# Altium PCB PCB1.PcbDoc (part 1 of 4)
Units mm, origin at the board's own origin, x right, y up, seen from the top; angles counter-clockwise.
Board outline 200 x 55 mm, 4 copper layers (Top Layer, Power Layer, GND Layer, Bottom Layer), stack 1.714 mm thick; 403 components, 272 nets, 1346 pads, 787 vias.
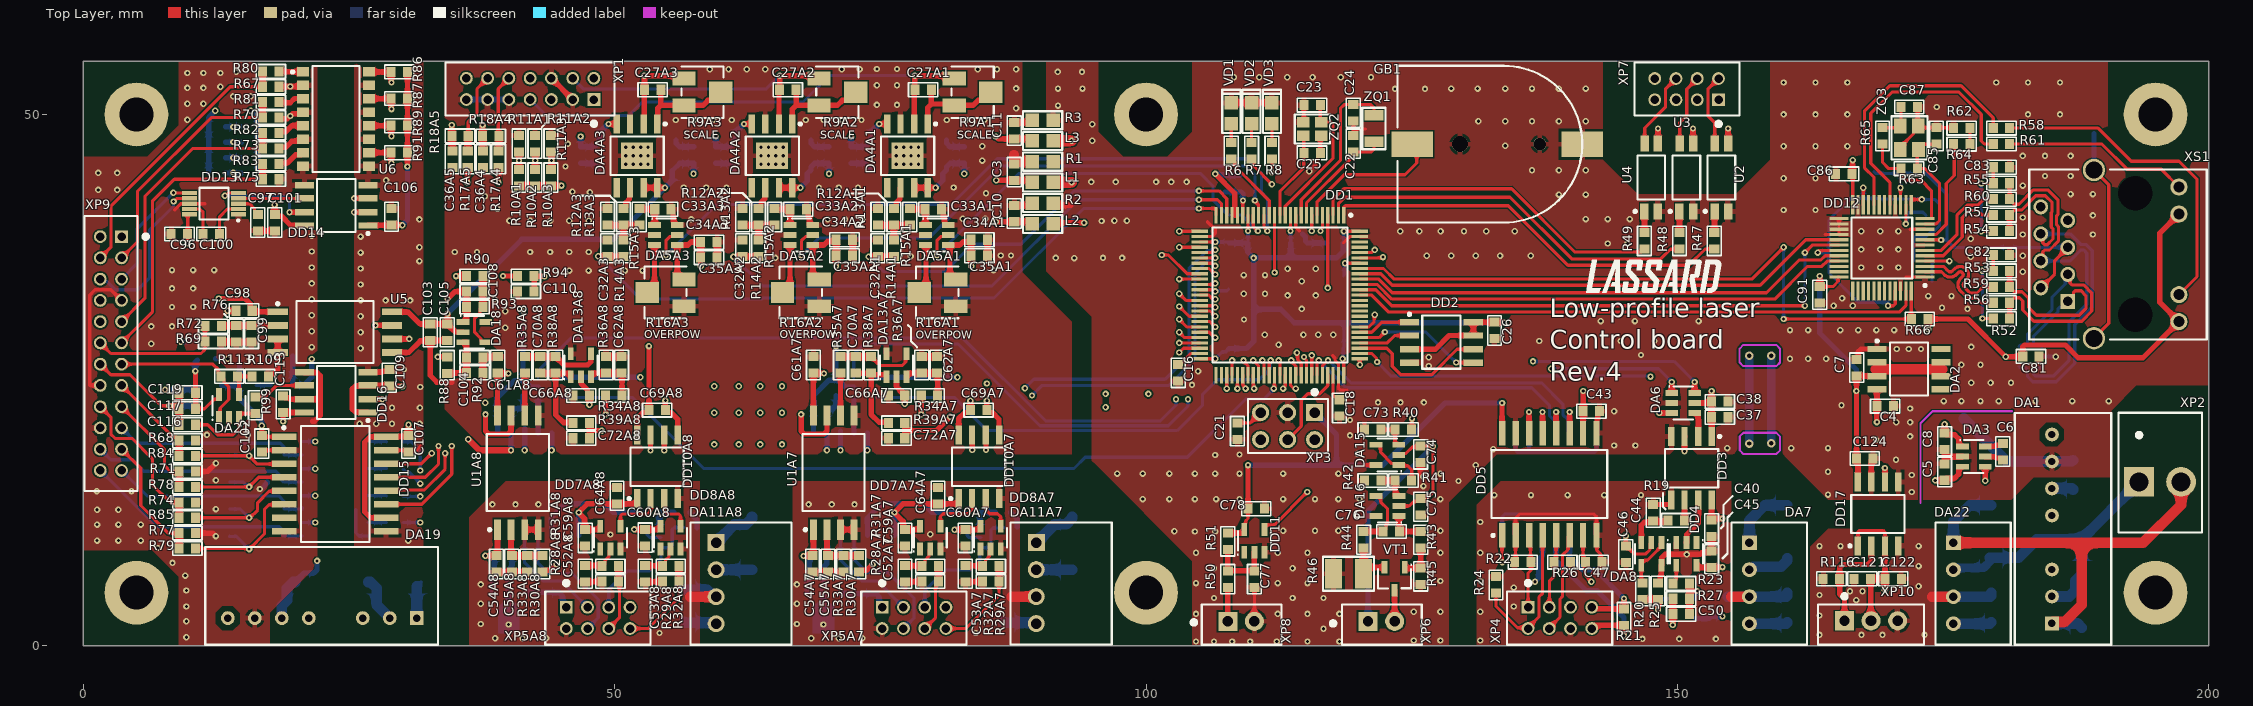
[diagram p0: Top Layer view]
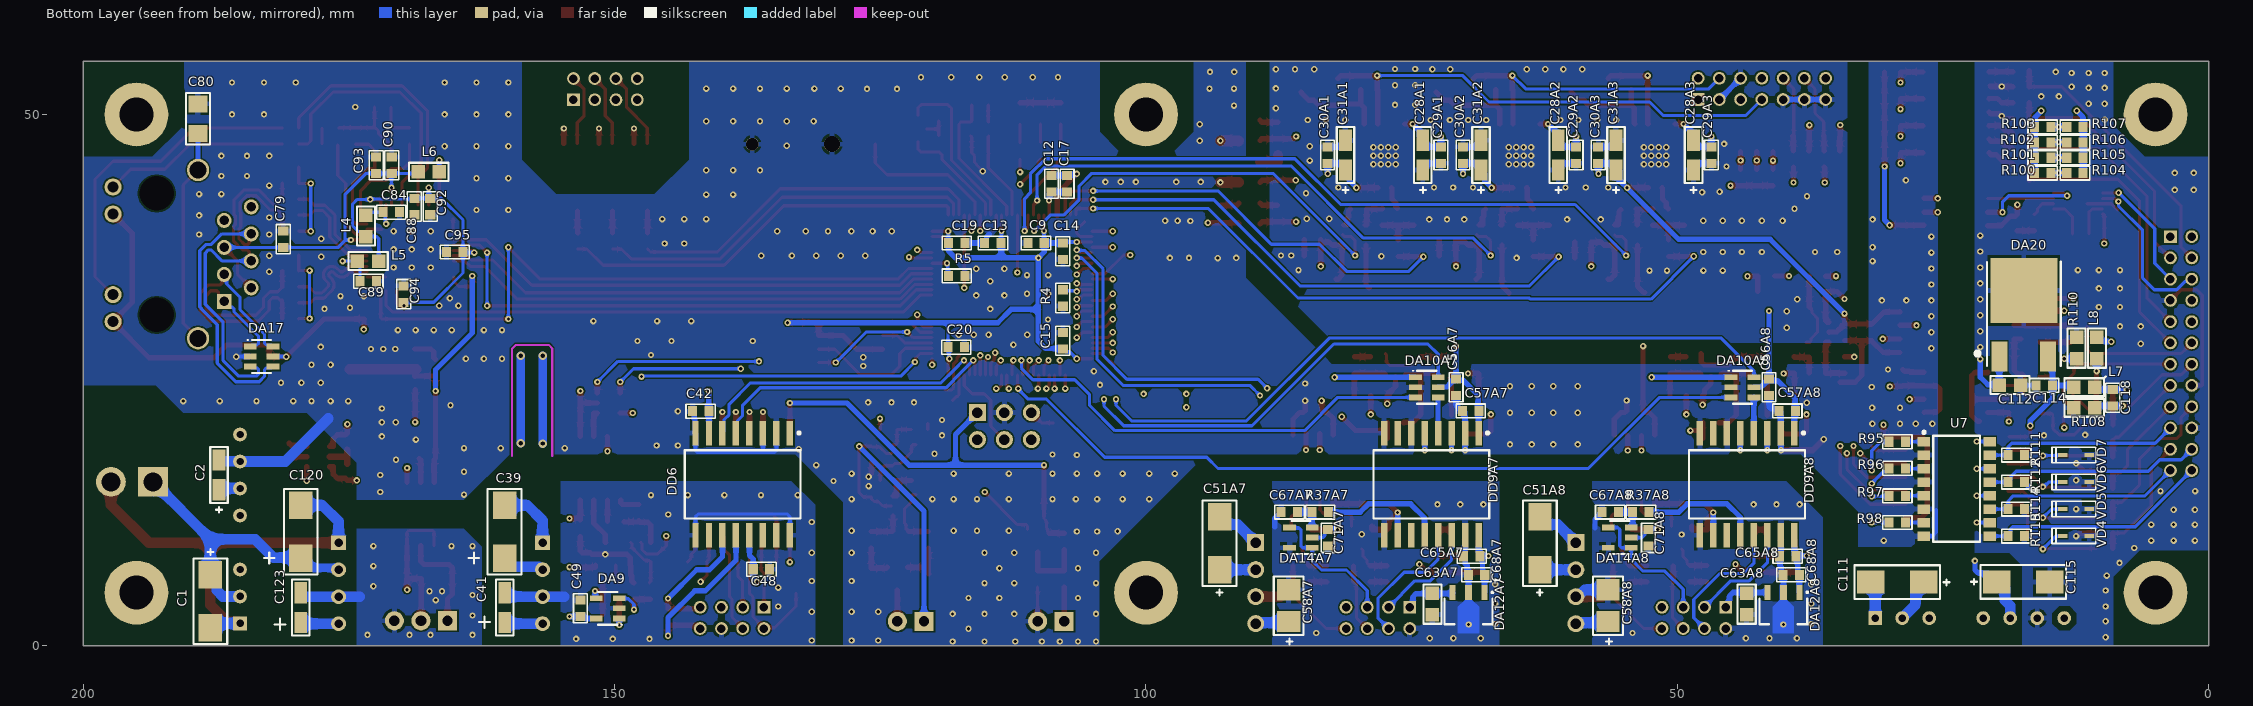
[diagram p1: Bottom Layer view, seen from below]
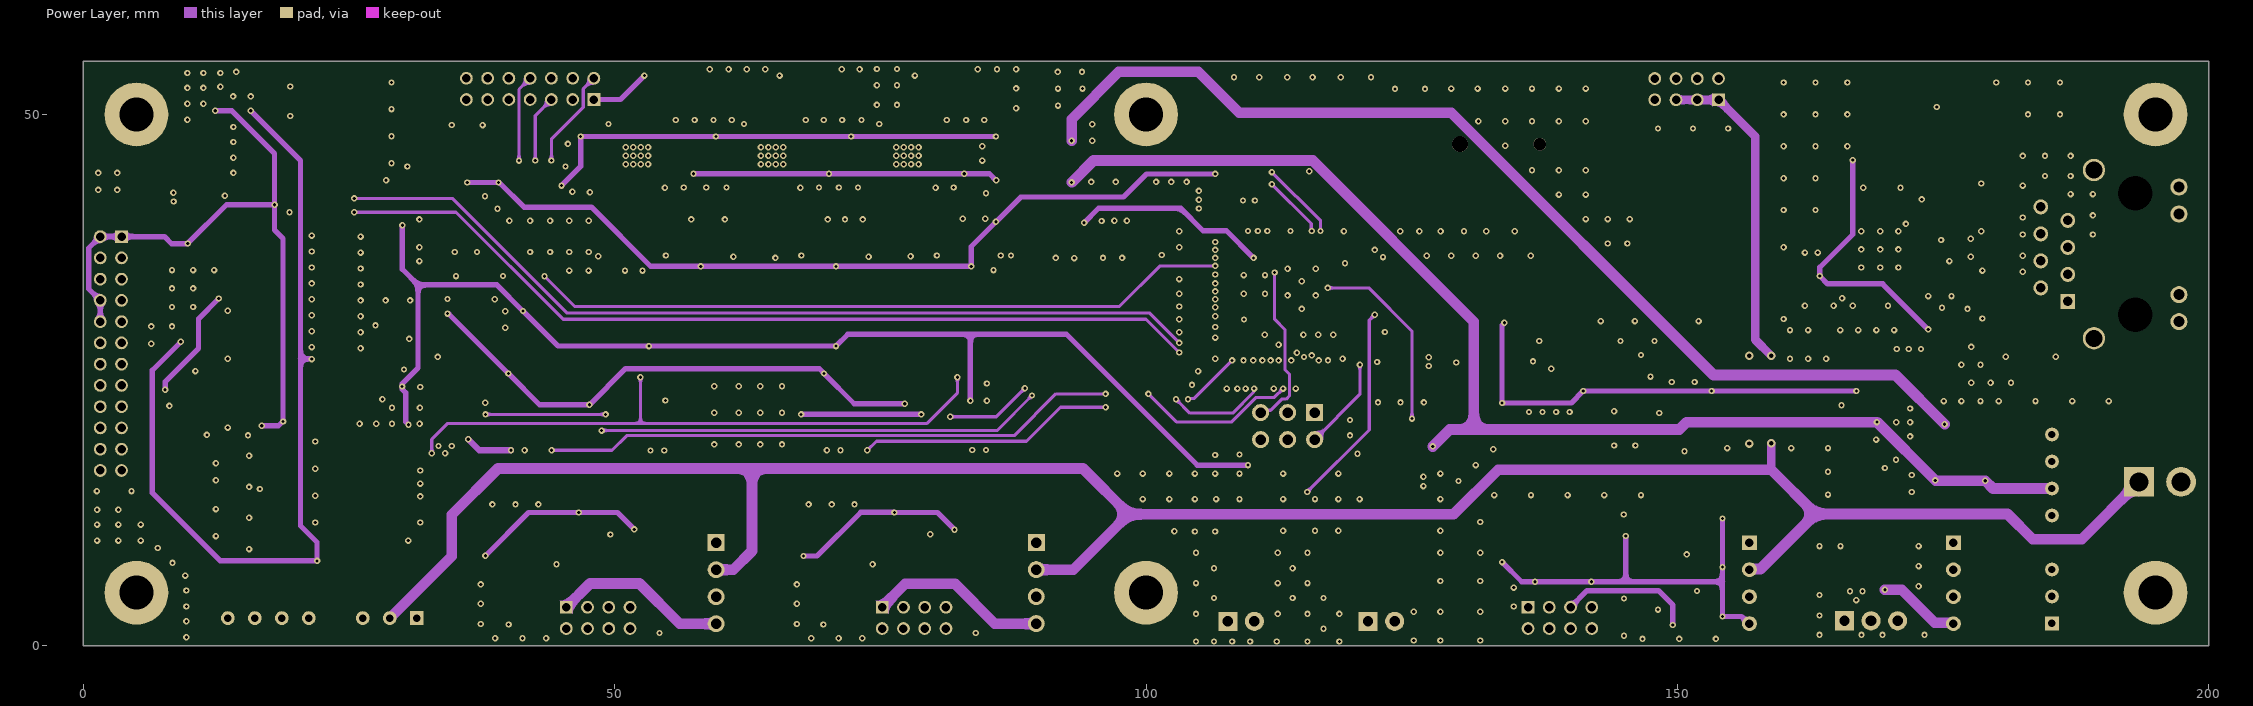
[diagram p2: Power Layer]
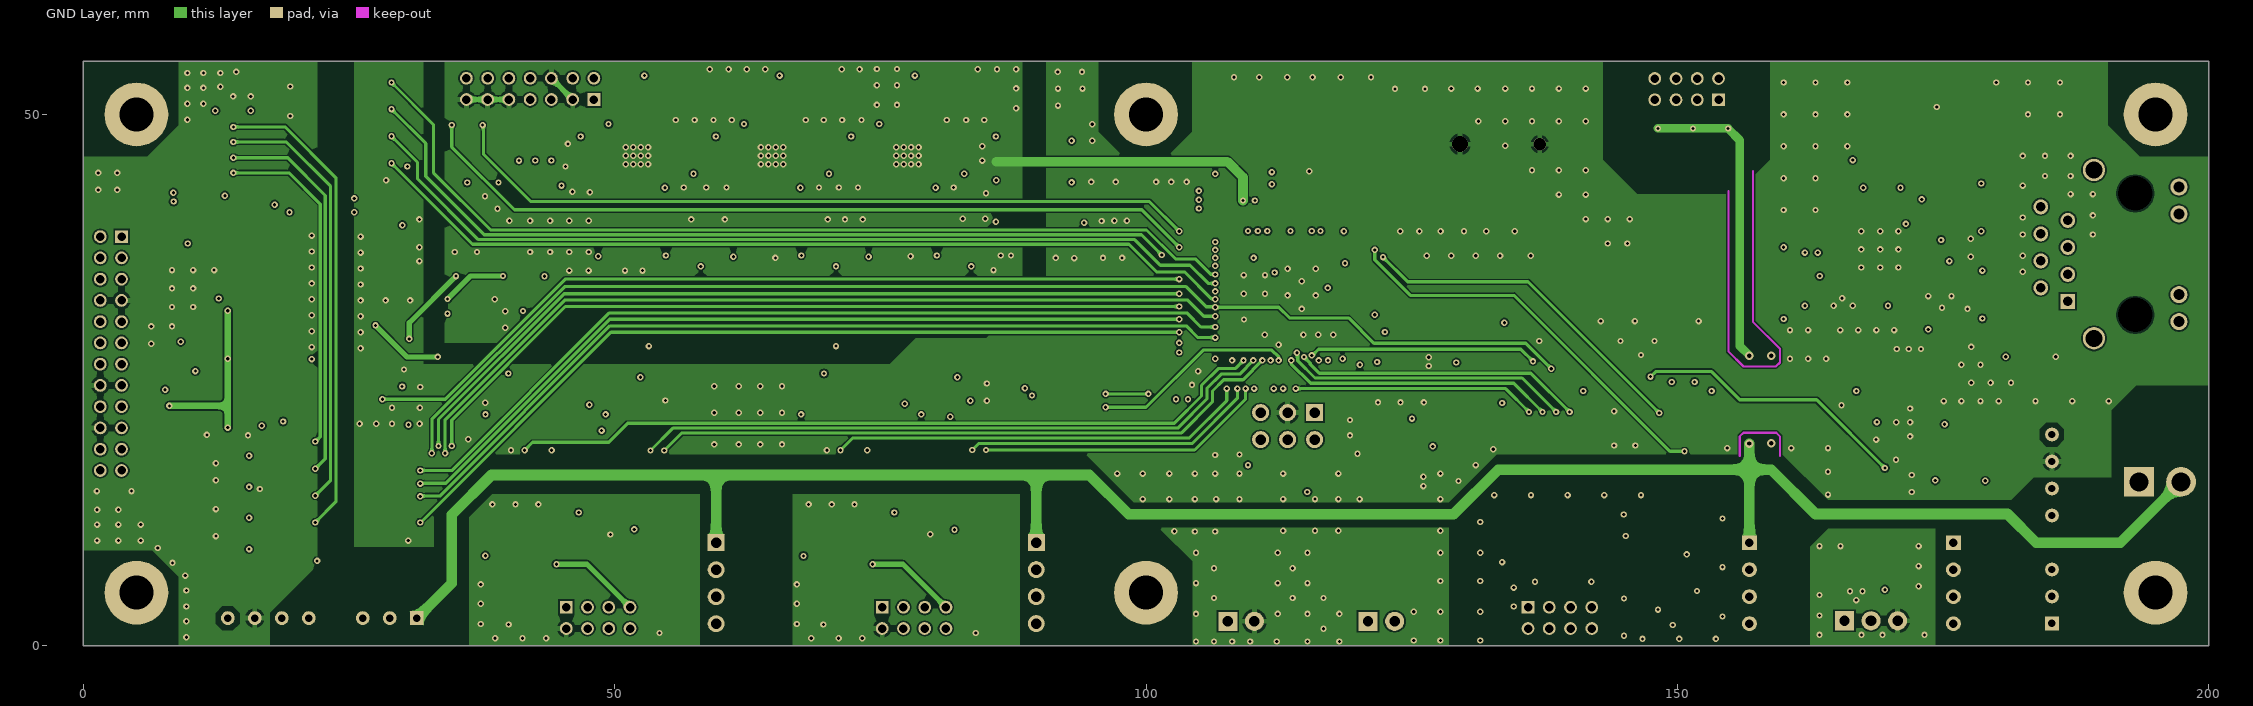
[diagram p3: GND Layer]
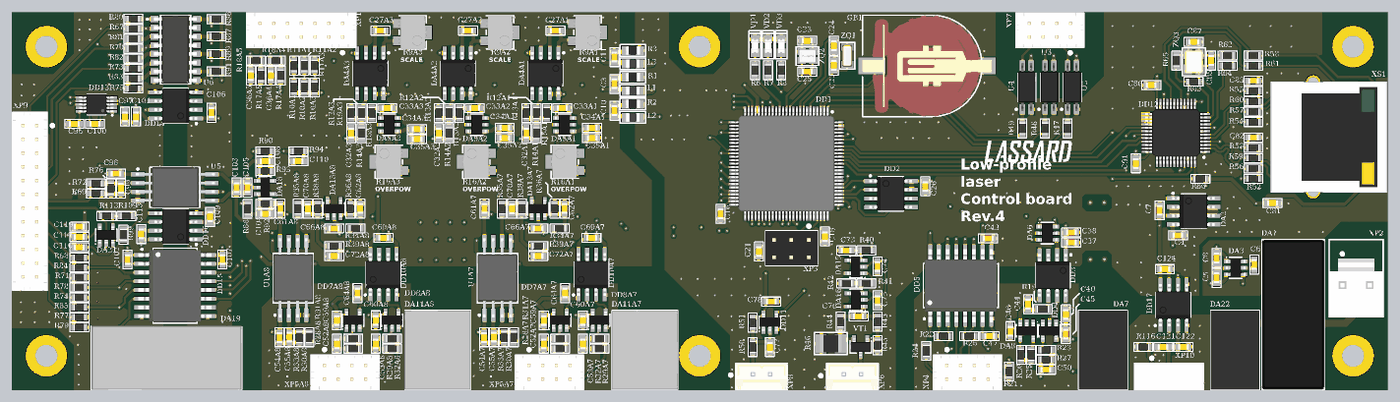
[diagram p7: 3D render of the assembled board from above, using the file's embedded part models]
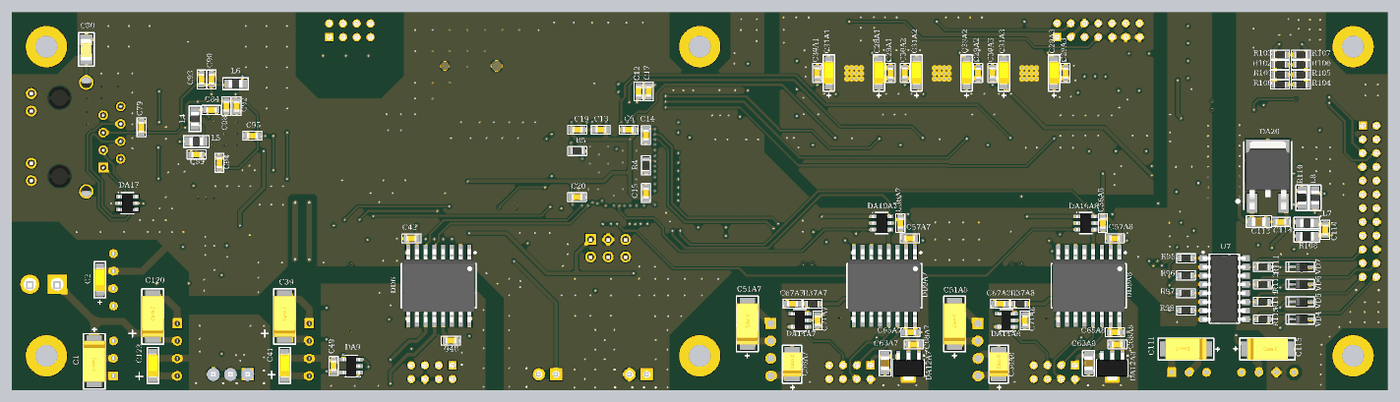
[diagram p8: 3D render of the assembled board from below, using the file's embedded part models]

## Layer stack, top to bottom
Top Solder: solder mask 0.0102, Solder Resist, Dk 3.5
Top Layer: signal copper 0.018
Dielectric 2: prepreg 0.0711, PP-006, Dk 4.1
Power Layer: signal copper 0.018
Dielectric 1: dielectric 1.5, FR-4, Dk 4.8
GND Layer: signal copper 0.018
Dielectric 3: prepreg 0.0711, PP-006, Dk 4.1
Bottom Layer: signal copper 0.018
Bottom Solder: solder mask 0.0102, Solder Resist, Dk 3.5

## Board outline
0,0 0,55 200,55 200,0

## Design rules (kind name [scope] priority, off if disabled: settings)
BoardOutlineClearance [(OnLayer('Bottom Layer') AND OnLayer('Top Layer'))] p1: gap=0.2 ignorepadtopadclearanceinfootprint=FALSE
Clearance [All] p1: gap=0.15 ignorepadtopadclearanceinfootprint=TRUE
DiffPairsRouting [All] p1: maxlimit=0.254 minlimit=0.2 mostfreqgap=0.254 toplayer_minwidth=0.3 toplayer_maxwidth=0.381 toplayer_prefwidth=0.381 midlayer1_minwidth=0.3 midlayer1_maxwidth=0.381 midlayer1_prefwidth=0.381 midlayer2_minwidth=0.3 midlayer2_maxwidth=0.381 midlayer2_prefwidth=0.381 bottomlayer_minwidth=0.3 bottomlayer_maxwidth=0.381 bottomlayer_prefwidth=0.381 maxuncoupledlength=12.7
Height [(OnLayer('Bottom Layer'))] p1: minheight=0 maxheight=3 prefheight=3
HoleSize [All] p1: absolutevalues=TRUE maxlimit=10 minlimit=0.2 maxpercent=80.000 minpercent=20.000
MinimumSolderMaskSliver [All] p1: minsoldermaskwidth=0.04
PlaneClearance [All] p1: clearance=0.5
PlaneConnect [All] p1: planeconnectstyle=Relief reliefexpansion=0.5 reliefentries=4 reliefconductorwidth=0.25 reliefairgap=0.25
PolygonConnect [All] p1: thpad.connectstyle=Relief thpad.reliefconductorwidth=0.5 thpad.reliefentries=4 thpad.polygonreliefangle="90 Angle" thpad.airgapwidth=0.25 smdpad.connectstyle=Relief smdpad.reliefconductorwidth=0.5 smdpad.reliefentries=4 smdpad.polygonreliefangle="90 Angle" smdpad.airgapwidth=0.25 via.connectstyle=Direct via.reliefconductorwidth=0.254 via.reliefentries=4 via.polygonreliefangle="90 Angle" via.airgapwidth=0.152
RoutingCorners [All] p1: cornerstyle=Round minsetback=0.254 maxsetback=2.54
RoutingVias [All] p1: holewidth=0.2 width=0.5 viastyle="Through Hole" minholewidth=0.2 minwidth=0.5 maxholewidth=1 maxwidth=1
SilkToSilkClearance [All] p1: silktosilkclearance=0.1
SilkToSolderMaskClearance [IsPad] p1: minsilkscreentomaskgap=0 clearancetoexposedcopper=TRUE
SolderMaskExpansion [All] p1: expansion=0.102 istentingtop=FALSE
SupplyNets "Schematic Supply Nets_30" [InNet('1V2O')] p1: voltage=0,000
SupplyNets "Schematic Supply Nets_29" [InNet('+12V_DRVA8')] p2: voltage=0,000
SupplyNets "Schematic Supply Nets_28" [InNet('+5V')] p3: voltage=0,000
SupplyNets "Schematic Supply Nets_27" [InNet('+5V_DRVA8')] p4: voltage=0,000
SupplyNets "Schematic Supply Nets_26" [InNet('1V2A')] p5: voltage=0,000
SupplyNets "Schematic Supply Nets_25" [InNet('+3.3VA')] p6: voltage=0,000
SupplyNets "Schematic Supply Nets_24" [InNet('+24V_HW')] p7: voltage=0,000
SupplyNets "Schematic Supply Nets_23" [InNet('+5VA_HW')] p8: voltage=0,000
SupplyNets "Schematic Supply Nets_22" [InNet('GND_24V')] p9: voltage=0,000
SupplyNets "Schematic Supply Nets_21" [InNet('1V2D')] p10: voltage=0,000
SupplyNets "Schematic Supply Nets_20" [InNet('GND_HW')] p11: voltage=0,000
SupplyNets "Schematic Supply Nets_19" [InNet('GND_FS')] p12: voltage=0,000
SupplyNets "Schematic Supply Nets_18" [InNet('GND_DRVA8')] p13: voltage=0,000
SupplyNets "Schematic Supply Nets_17" [InNet('+5V_PS')] p14: voltage=0,000
SupplyNets "Schematic Supply Nets_16" [InNet('+5V_DRVA7')] p15: voltage=0,000
SupplyNets "Schematic Supply Nets_15" [InNet('AGND_HW')] p16: voltage=0,000
SupplyNets "Schematic Supply Nets_14" [InNet('GND')] p17: voltage=0,000
SupplyNets "Schematic Supply Nets_13" [InNet('+5V_HW')] p18: voltage=0,000
SupplyNets "Schematic Supply Nets_12" [InNet('+5V_FS')] p19: voltage=0,000
SupplyNets "Schematic Supply Nets_11" [InNet('+VBAT')] p20: voltage=0,000
SupplyNets "Schematic Supply Nets_10" [InNet('+24VA_HW')] p21: voltage=0,000
SupplyNets "Schematic Supply Nets_9" [InNet('AGND')] p22: voltage=0,000
SupplyNets "Schematic Supply Nets_8" [InNet('+5VA')] p23: voltage=0,000
SupplyNets "Schematic Supply Nets_7" [InNet('+3.3VA_ETH')] p24: voltage=0,000
SupplyNets "Schematic Supply Nets_6" [InNet('-5V')] p25: voltage=0,000
SupplyNets "Schematic Supply Nets_5" [InNet('GND_PS')] p26: voltage=0,000
SupplyNets "Schematic Supply Nets_4" [InNet('-5VA')] p27: voltage=0,000
SupplyNets "Schematic Supply Nets_3" [InNet('+12V_DRVA7')] p28: voltage=0,000
SupplyNets "Schematic Supply Nets_2" [InNet('+24V')] p29: voltage=0,000
SupplyNets "Schematic Supply Nets_1" [InNet('+3.3V')] p30: voltage=0,000
SupplyNets "Schematic Supply Nets" [InNet('GND_DRVA7')] p31: voltage=0,000
Width [All] p1: maxlimit=1 minlimit=0.2 preferedwidth=0.3 minimp=50.000000 maximp=50.000000 favimp=50.000000
21 further rules are at their usual default settings.

## Classes and differential pairs
component class A8: C51A8 C52A8 C53A8 C54A8 C55A8 C56A8 C57A8 C58A8 C59A8 C60A8 C61A8 C62A8 C63A8 C64A8 C65A8 C66A8 C67A8 C68A8 C69A8 C70A8 C71A8 C72A8 DA10A8 DA11A8 DA12A8 DA13A8 DA14A8 DD7A8 DD8A8 DD9A8 DD10A8 R28A8 R29A8 R30A8 R31A8 R32A8 R33A8 R34A8 R35A8 R36A8 R37A8 R38A8 R39A8 U1A8 XP5A8
component class A5: C36A5 R17A5 R18A5
component class A14: C120 C121 C122 C123 C124 DA22 DD17 R116 XP10
component class A9: C73 C74 C75 C76 DA15 DA16 R40 R41 R42 R43 R44 R45 R46 VT1 XP6
component class A3: C27A3 C28A3 C29A3 C30A3 C31A3 C32A3 C33A3 C34A3 C35A3 DA4A3 DA5A3 DA5A11 R9A3 R10A3 R11A3 R12A3 R13A3 R14A3 R15A3 R16A3
component class A11: C77 C78 DD11 R50 R51 XP8
component class Main: C1 C2 C3 C4 C5 C6 C7 C8 C9 C10 C11 C12 C13 C14 C15 C16 C17 C18 C19 C20 C21 C22 C23 C24 C25 C26 DA1 DA2 DA3 DD1 DD2 GB1 L1 L2 L3 R1 R2 R3 R4 R5 R6 R7 R8 VD1 VD2 VD3 XP1 XP2 XP3 ZQ1 ZQ2
component class A13: C96 C97 C98 C99 C100 C101 C102 C103 C104 C105 C106 C107 C108 C109 C110 C111 C112 C113 C114 C115 C116 C117 C118 C119 DA18 DA19 DA20 DA21 DD13 DD14 DD15 DD16 L7 L8 R67 R68 R69 R70 R71 R72 R73 R74 R75 R76 R77 R78 R79 R80 R81 R82 R83 R84 R85 R86 R87 R88 R89 R90 R91 R92 R93 R94 R95 R96 R97 R98 R99 R100 R101 R102 R103 R104 R105 R106 R107 R108 R109 R110 R111 R112 R113 R114 R115 U5 U6 U7 VD4 VD5 VD6 VD7 XP9
component class A6: C37 C38 C39 C40 C41 C42 C43 C44 C45 C46 C47 C48 C49 C50 DA6 DA7 DA8 DA9 DD3 DD4 DD5 DD6 R19 R20 R21 R22 R23 R24 R25 R26 R27 XP4
component class A12: C79 C80 C81 C82 C83 C84 C85 C86 C87 C88 C89 C90 C91 C92 C93 C94 C95 DA17 DD12 L4 L5 L6 R52 R53 R54 R55 R56 R57 R58 R59 R60 R61 R62 R63 R64 R65 R66 XS1 ZQ3
differential pair class TD: TXO
differential pair class RD: RXI
channel class Thermistor: A4 A5
channel class Photodiode: A1 A2 A3
channel class LD_driver: A7 A8
component class A10: R47 R48 R49 U2 U3 U4 XP7
component class A7: C51A7 C52A7 C53A7 C54A7 C55A7 C56A7 C57A7 C58A7 C59A7 C60A7 C61A7 C62A7 C63A7 C64A7 C65A7 C66A7 C67A7 C68A7 C69A7 C70A7 C71A7 C72A7 DA10A7 DA11A7 DA12A7 DA13A7 DA14A7 DD7A7 DD8A7 DD9A7 DD10A7 R28A7 R29A7 R30A7 R31A7 R32A7 R33A7 R34A7 R35A7 R36A7 R37A7 R38A7 R39A7 U1A7 XP5A7
component class A4: C36A4 R17A4 R18A4
component class A2: C27A2 C28A2 C29A2 C30A2 C31A2 C32A2 C33A2 C34A2 C35A2 DA4A2 DA5A2 R9A2 R10A2 R11A2 R12A2 R13A2 R14A2 R15A2 R16A2
component class A1: C27A1 C28A1 C29A1 C30A1 C31A1 C32A1 C33A1 C34A1 C35A1 DA4A1 DA5A1 R9A1 R10A1 R11A1 R12A1 R13A1 R14A1 R15A1 R16A1
differential pair TXO: +TXO_P -TXO_N
differential pair TD: +TD_P -TD_N
differential pair RXI: +RXI_P -RXI_N
differential pair RD: +RD_P -RD_N

## Components (designator, comment, footprint, x,y, rotation, side; value= is the part's Value field where it differs from the comment)
C1 "10мкФх35B" CAP_C 188.05,6.7 r270 bottom
C2 "10мкФх10B" CAP_A 187.225,14.675 r90 bottom
C3 "0,1мкФ" CAP_0603 87.6,43.775 r90 top
C4 "0,1мкФ" CAP_0603 170.35,22.55 r180 top
C5 "10мкФ" CAP_0603 175.15,15.55 r90 top
C6 "1мкФ" CAP_0603 180.625,17.475 r90 top
C7 "10мкФ" CAP_0603 166.875,25.375 r90 top
C8 "10мкФ" CAP_0603 175.15,20.05 r270 top
C9 "0,1мкФ" CAP_0603 109.55,37.9 r0 bottom
C10 "0,1мкФ" CAP_0603 87.6,39.875 r90 top
C11 "0,1мкФ" CAP_0603 87.6,47.675 r90 top
C12 "0,1мкФ" CAP_0603 108.891,42.683 r90 bottom
C13 "0,1мкФ" CAP_0603 115.2,37.9 r180 bottom
C14 "0,1мкФ" CAP_0603 107.825,36.325 r90 bottom
C15 "0,1мкФ" CAP_0603 107.825,29.5 r270 bottom
C16 "2,2мкФ" CAP_0603 103.025,26.475 r270 top
C17 "0,1мкФ" CAP_0603 107.425,42.675 r90 bottom
C18 "2,2мкФ" CAP_0603 118.2,23.175 r270 top
C19 "0,1мкФ" CAP_0603 118.6,37.9 r180 bottom
C20 "0,1мкФ" CAP_0603 118.65,28.1 r180 bottom
C21 "0,1мкФ" CAP_0603 108.6,21 r270 top
C22 "18пФ" CAP_0603 119.5,46.45 r90 top
C23 "8пФ" CAP_0603 116.425,50.875 r180 top
C24 "18пФ" CAP_0603 119.5,50.95 r270 top
C25 "8пФ" CAP_0603 114.825,46.375 r0 top
C26 "0,1мкФ" CAP_0603 132.796,30.471 r270 top
C27A1 "22пФ" CAP_0603 79.825,52.325 r180 top (schematic designator C27)
C27A2 "22пФ" CAP_0603 67.1,52.325 r180 top (schematic designator C27)
C27A3 "22пФ" CAP_0603 54.375,52.325 r180 top (schematic designator C27)
C28A1 "10мкФх10B" CAP_A 73.95,44.775 r90 bottom (schematic designator C28)
C28A2 "10мкФх10B" CAP_A 61.2,44.775 r90 bottom (schematic designator C28)
C28A3 "10мкФх10B" CAP_A 48.475,44.775 r90 bottom (schematic designator C28)
C29A1 "0,1мкФ" CAP_0603 72.25,46.975 r270 bottom (schematic designator C29)
C29A2 "0,1мкФ" CAP_0603 59.525,46.975 r270 bottom (schematic designator C29)
C29A3 "0,1мкФ" CAP_0603 46.8,46.975 r270 bottom (schematic designator C29)
C30A1 "0,1мкФ" CAP_0603 82.925,45.375 r90 bottom (schematic designator C30)
C30A2 "0,1мкФ" CAP_0603 70.175,45.375 r90 bottom (schematic designator C30)
C30A3 "0,1мкФ" CAP_0603 57.45,45.375 r90 bottom (schematic designator C30)
C31A1 "10мкФх10B" CAP_A 81.225,44.775 r90 bottom (schematic designator C31)
C31A2 "10мкФх10B" CAP_A 68.475,44.775 r90 bottom (schematic designator C31)
C31A3 "10мкФх10B" CAP_A 55.775,44.775 r90 bottom (schematic designator C31)
C32A1 "0,1мкФ" CAP_0603 74.775,36.6 r90 top (schematic designator C32)
C32A2 "0,1мкФ" CAP_0603 62.05,36.6 r90 top (schematic designator C32)
C32A3 "0,1мкФ" CAP_0603 49.325,36.6 r90 top (schematic designator C32)
C33A1 "22пФ" CAP_0603 79.2,41.075 r0 top (schematic designator C33)
C33A2 "22пФ" CAP_0603 66.475,41.075 r0 top (schematic designator C33)
C33A3 "22пФ" CAP_0603 53.75,41.075 r0 top (schematic designator C33)
C34A1 "0,1мкФ" CAP_0603 83.525,38.205 r0 top (schematic designator C34)
C34A2 "0,1мкФ" CAP_0603 70.825,38.205 r0 top (schematic designator C34)
C34A3 "0,1мкФ" CAP_0603 58.075,37.98 r0 top (schematic designator C34)
C35A1 "2,2мкФ" CAP_0603 83.525,36.705 r0 top (schematic designator C35)
C35A2 "2,2мкФ" CAP_0603 70.825,36.705 r0 top (schematic designator C35)
C35A3 "2,2мкФ" CAP_0603 58.075,36.525 r0 top (schematic designator C35)
C36A4 "0,1мкФ" CAP_0603 37.628,46.597 r270 top (schematic designator C36)
C36A5 "0,1мкФ" CAP_0603 34.725,46.6 r270 top (schematic designator C36)
C37 "0,1мкФ" CAP_0603 153.2,21.5 r0 top
C38 "0,1мкФ" CAP_0603 153.2,22.975 r0 top
C39 "10мкФх35B" CAP_C 160.35,8.225 r90 bottom
C40 "0,1мкФ" CAP_0603 153.225,11.85 r270 top
C41 "10мкФх10B" CAP_A 160.35,2.2 r90 bottom
C42 "0,1мкФ" CAP_0603 141.106,22.075 r0 bottom
C43 "0,1мкФ" CAP_0603 141.106,22.075 r0 top
C44 "10нФ" CAP_0603 147.725,11.725 r90 top
C45 "0,1мкФ" CAP_0603 153.225,7.35 r90 top
C46 "0,1мкФ" CAP_0603 145.15,9.4 r270 top
C47 "0,1мкФ" CAP_0603 141.331,7.875 r0 top
C48 "0,1мкФ" CAP_0603 136.981,7.2 r180 bottom
C49 "0,1мкФ" CAP_0603 153.225,2.725 r90 bottom
C50 "1500пФ" CAP_0603 151.15,2.975 r180 top
C51A7 "10мкФх35B" CAP_C 93.075,7.15 r90 bottom (schematic designator C51)
C51A8 "10мкФх35B" CAP_C 62.925,7.15 r90 bottom (schematic designator C51)
C52A7 "0,1мкФ" CAP_0603 77.325,7.575 r270 top (schematic designator C52)
C52A8 "0,1мкФ" CAP_0603 47.225,7.575 r270 top (schematic designator C52)
C53A7 "0,1мкФ" CAP_0603 83,7.575 r270 top (schematic designator C53)
C53A8 "0,1мкФ" CAP_0603 52.875,7.575 r270 top (schematic designator C53)
C54A7 "0,1мкФ" CAP_0603 68.625,8.5 r270 top (schematic designator C54)
C54A8 "0,1мкФ" CAP_0603 38.875,8.5 r270 top (schematic designator C54)
C55A7 "100пФ" CAP_0603 70.075,6.9 r90 top (schematic designator C55)
C55A8 "100пФ" CAP_0603 40.325,6.9 r90 top (schematic designator C55)
C56A7 "0,1мкФ" CAP_0603 70.825,25.125 r270 bottom (schematic designator C56)
C56A8 "0,1мкФ" CAP_0603 41.375,25.125 r270 bottom (schematic designator C56)
C57A7 "0,1мкФ" CAP_0603 68.65,22.1 r0 bottom (schematic designator C57)
C57A8 "0,1мкФ" CAP_0603 38.85,22.1 r0 bottom (schematic designator C57)
C58A7 "10мкФх25B" CAP_B 86.575,2.275 r90 bottom (schematic designator C58)
C58A8 "10мкФх25B" CAP_B 56.525,2.275 r90 bottom (schematic designator C58)
C59A7 "0,1мкФ" CAP_0603 77.325,10.95 r270 top (schematic designator C59)
C59A8 "0,1мкФ" CAP_0603 47.225,10.95 r270 top (schematic designator C59)
C60A7 "0,1мкФ" CAP_0603 83,10.95 r270 top (schematic designator C60)
C60A8 "0,1мкФ" CAP_0603 52.875,10.975 r270 top (schematic designator C60)
C61A7 "0,1мкФ" CAP_0603 68.7,25.625 r90 top (schematic designator C61)
C61A8 "0,1мкФ" CAP_0603 39,25.625 r90 top (schematic designator C61)
C62A7 "100пФ" CAP_0603 80.35,25.625 r90 top (schematic designator C62)
C62A8 "100пФ" CAP_0603 50.65,25.625 r90 top (schematic designator C62)
C63A7 "0,33мкФ" CAP_0805 73.05,2.925 r90 bottom (schematic designator C63)
C63A8 "0,33мкФ" CAP_0805 43.475,2.925 r90 bottom (schematic designator C63)
C64A7 "0,1мкФ" CAP_0603 80.425,13.325 r90 top (schematic designator C64)
C64A8 "0,1мкФ" CAP_0603 50.225,13.325 r90 top (schematic designator C64)
C65A7 "0,1мкФ" CAP_0603 68.55,8.425 r0 bottom (schematic designator C65)
C65A8 "0,1мкФ" CAP_0603 38.825,8.425 r0 bottom (schematic designator C65)
C66A7 "0,1мкФ" CAP_0603 77.325,23.55 r180 top (schematic designator C66)
C66A8 "0,1мкФ" CAP_0603 47.65,23.55 r180 top (schematic designator C66)
C67A7 "10нФ" CAP_0603 85.7,12.575 r0 bottom (schematic designator C67)
C67A8 "10нФ" CAP_0603 55.525,12.575 r0 bottom (schematic designator C67)
C68A7 "0,1мкФ" CAP_0603 68.1,6.675 r0 bottom (schematic designator C68)
C68A8 "0,1мкФ" CAP_0603 38.475,6.675 r0 bottom (schematic designator C68)
C69A7 "0,1мкФ" CAP_0603 83.45,22.175 r0 top (schematic designator C69)
C69A8 "0,1мкФ" CAP_0603 53.2,22.175 r0 top (schematic designator C69)
C70A7 "100пФ" CAP_0603 72.691,27.225 r270 top (schematic designator C70)
C70A8 "100пФ" CAP_0603 43,27.225 r270 top (schematic designator C70)
C71A7 "0,1мкФ" CAP_0603 82.875,10.95 r270 bottom (schematic designator C71)
C71A8 "0,1мкФ" CAP_0603 52.725,10.95 r270 bottom (schematic designator C71)
C72A7 "0,1мкФ" CAP_0603 77.325,19.525 r180 top (schematic designator C72)
C72A8 "0,1мкФ" CAP_0603 47.65,19.525 r180 top (schematic designator C72)
C73 "1мкФ" CAP_0603 122.125,20.35 r180 top
C74 "0,1мкФ" CAP_0603 125.837,18.813 r270 top
C75 "0,1мкФ" CAP_0603 125.85,13.875 r270 top
C76 "100пФ" CAP_0603 123.896,10.757 r180 top
C77 "1мкФ" CAP_0603 110.2,7.075 r270 top
C78 "0,1мкФ" CAP_0603 109.575,12.9 r0 top
C79 "0,1мкФ" CAP_0603 181.179,37.462 r90 bottom
C80 "1нФх2кВ" CAP_1206 189.2,48.2 r90 bottom
C81 "0,1мкФ" CAP_0603 182.475,27.225 r0 top
C82 "0,1мкФ" CAP_0603 179.7,36.778 r0 top
C83 "0,1мкФ" CAP_0603 179.7,45.025 r0 top
C84 "0,1мкФ" CAP_0603 171.825,40.8 r180 bottom
C85 "8пФ" CAP_0603 174.375,47.175 r90 top
C86 "0,1мкФ" CAP_0603 166.475,44.4 r180 top
C87 "8пФ" CAP_0603 171.025,50.7 r0 top
C88 "0,1мкФ" CAP_0603 168.85,42.135 r270 bottom
C89 "0,1мкФ" CAP_0603 173.975,34.3 r180 bottom
C90 "0,1мкФ" CAP_0603 170.975,44.425 r90 bottom
C91 "0,1мкФ" CAP_0603 163.4,33.825 r270 top
C92 "0,1мкФ" CAP_0603 167.35,42.135 r270 bottom
C93 "0,1мкФ" CAP_0603 172.442,44.425 r90 bottom
C94 "0,1мкФ" CAP_0603 169.85,32.295 r90 bottom
C95 "0,1мкФ" CAP_0603 164.245,37.05 r0 bottom
C96 "0,1мкФ" CAP_0603 9.85,38.75 r180 top
C97 "0,1мкФ" CAP_0603 16.425,40.625 r270 top
C98 "0,1мкФ" CAP_0603 15.925,31.525 r180 top
C99 "100пФ" CAP_0603 15.841,28.55 r90 top
C100 "0,1мкФ" CAP_0603 11.25,38.75 r0 top
C101 "0,1мкФ" CAP_0603 18.025,40.625 r270 top
C102 "0,1мкФ" CAP_0603 16.8,19.825 r270 top
C103 "0,1мкФ" CAP_0603 32.65,30.3 r270 top
C104 "100пФ" CAP_0603 36.025,25.682 r0 top
C105 "0,1мкФ" CAP_0603 34.25,30.307 r270 top
C106 "0,1мкФ" CAP_0603 29,39.575 r90 top
C107 "0,1мкФ" CAP_0603 30.6,19.825 r270 top
C108 "100пФ" CAP_0603 37.625,33.332 r180 top
C109 "0,1мкФ" CAP_0603 28.8,24.425 r90 top
C110 "0,1мкФ" CAP_0603 42.45,33.332 r180 top
C111 "10мкФх35B" CAP_C 26.8,6 r0 bottom
C112 "0,33мкФ" CAP_0805 17.7,24.535 r0 bottom
C113 "0,1мкФ" CAP_0603 18.8,21.925 r90 top
C114 "0,1мкФ" CAP_0603 14.675,24.5 r0 bottom
C115 "10мкФх35B" CAP_C 19.959,6 r180 bottom
C116 "1мкФ" CAP_0603 10.6,20.8 r180 top
C117 "0,1мкФ" CAP_0603 10.6,22.3 r180 top
C118 "0,1мкФ" CAP_0603 9.032,24.145 r270 bottom
C119 "0,1мкФ" CAP_0603 10.599,23.807 r180 top
C120 "10мкФх35B" CAP_C 179.525,8.225 r90 bottom
C121 "0,1мкФ" CAP_0603 168.2,6.3 r180 top
C122 "0,1мкФ" CAP_0603 169.5,6.3 r0 top
C123 "10мкФх10B" CAP_A 179.525,2.2 r90 bottom
C124 "0,1мкФ" CAP_0603 166.825,17.625 r0 top
DA1 "TMR 6-2411" "TMR3 (SIP-8)" 185.25,2.1 r90 top
DA2 "LD1117D33CTR" SOIC-8 168.8,27.925 r0 top
DA3 "LM2776DBVR" SOT-23-6 176.825,18.75 r0 top
DA4A1 "ADA4817-1ARDZ" "SOIC-8 EPAD" 79.45,49.105 r270 top (schematic designator DA4)
DA4A2 "ADA4817-1ARDZ" "SOIC-8 EPAD" 66.716,49.105 r270 top (schematic designator DA4)
DA4A3 "ADA4817-1ARDZ" "SOIC-8 EPAD" 54,49.105 r270 top (schematic designator DA4)
DA5A1 "TLV3501AIDBVR" SOT-23-6 79.25,39.6 r0 top (schematic designator DA5)
DA5A2 "TLV3501AIDBVR" SOT-23-6 66.5,39.6 r0 top (schematic designator DA5)
DA5A3 "TLV3501AIDBVR" SOT-23-6 53.75,39.6 r0 top (schematic designator DA5)
DA6 "SN74LVC1G3157DBV" SOT-23-6 149.475,23.8 r0 top
DA7 "TME 2405S" "TME (SIP-4)" 156.781,9.7 r270 top
DA8 "LMC7101BIM5" SOT-23-5 148.5,9.725 r270 top
DA9 "LMV721M5" SOT-23-5 149.575,2.575 r0 bottom
DA10A7 "SN74LVC1G3157DBV" SOT-23-6 74.65,25.275 r180 bottom (schematic designator DA10)
DA10A8 "SN74LVC1G3157DBV" SOT-23-6 44.95,25.275 r180 bottom (schematic designator DA10)
DA11A7 "TMU 3-2412" "TMU3 (SIP-4)" 89.675,9.705 r270 top (schematic designator DA11)
DA11A8 "TMU 3-2412" "TMU3 (SIP-4)" 59.55,9.695 r270 top (schematic designator DA11)
DA12A7 "L78L05ABUTR" SOT-89 68.15,5.025 r0 bottom (schematic designator DA12)
DA12A8 "L78L05ABUTR" SOT-89 38.525,5.025 r0 bottom (schematic designator DA12)
DA13A7 "LMC7101BIM5" SOT-23-5 75.575,25.325 r90 top (schematic designator DA13)
DA13A8 "LMC7101BIM5" SOT-23-5 45.875,25.325 r90 top (schematic designator DA13)
DA14A7 "LMC7101BIM5" SOT-23-5 84.35,9.225 r0 bottom (schematic designator DA14)
DA14A8 "LMC7101BIM5" SOT-23-5 54.35,9.225 r0 bottom (schematic designator DA14)
DA15 "LMC7101BIM5" SOT-23-5 123.787,17.013 r180 top
DA16 "LMC7101BIM5" SOT-23-5 123.8,12.2 r180 top
DA17 "TPD4S009DBVR" SOT-23-6 184.3,28.175 r180 bottom
DA18 "LMC7101BIM5" SOT-23-5 35.725,30.457 r0 top
DA19 "TMR 4-2415" "TMR4 (SIP-8)" 31.38,2.6 r180 top
DA20 "L78M05CDT-TR" TO-252 19.7,27.229 r180 bottom
DA21 "LM7301IM5X/NOPB" SOT-23-5 12.758,21.5 r90 top
DA22 "TME 2405S" "TME (SIP-4)" 175.975,9.695 r270 top
DD1 "STM32F405VGT6" LQFP-100 118.625,40.525 r270 top
DD2 "W25Q16JVSNIQ" SOIC-8 124.796,30.446 r0 top
DD3 "ADUM1200CR" SOIC-8 153.225,19.7 r270 top
DD4 "SN74AHC1G14DBV" SOT-23-5 151.8,9.725 r270 top
DD5 "ADUM1401CRW" SOIC-16W 133.506,10.41 r90 top
DD6 "ADM3054BRWZ" SOIC-16W 133.506,20 r270 bottom
DD7A7 "SN74LVC1G17DBV" SOT-23-5 78.75,9.1 r90 top (schematic designator DD7)
DD7A8 "SN74LVC1G17DBV" SOT-23-5 48.65,9.1 r90 top (schematic designator DD7)
DD8A7 "SN74LVC1G17DBV" SOT-23-5 84.425,9.1 r90 top (schematic designator DD8)
DD8A8 "SN74LVC1G17DBV" SOT-23-5 54.3,9.1 r90 top (schematic designator DD8)
DD9A7 "ADUM1400CRW" SOIC-16W 68.705,20 r270 bottom (schematic designator DD9)
DD9A8 "ADUM1400CRW" SOIC-16W 38.99,20 r270 bottom (schematic designator DD9)
DD10A7 "ADUM1200CR" SOIC-8 82.375,13.85 r90 top (schematic designator DD10)
DD10A8 "ADUM1200CR" SOIC-8 52.125,13.85 r90 top (schematic designator DD10)
DD11 "SN74LVC1G17DBV" SOT-23-5 109.25,8.8 r90 top
DD12 "W5100S-L" LQFP-48 173.3,34.7 r180 top
DD13 "ADM101EARM" MSOP-10 14.575,40.6 r180 top
DD14 "ADUM1201CR" SOIC-8 26.8,39.55 r180 top
DD15 "ADUM1400CRW" SOIC-16W 18.9,19.67 r0 top
DD16 "ADUM1100BR" SOIC-8 26.8,21.95 r180 top
DD17 "ADUM1100BR" SOIC-8 166.989,9.4 r90 top
GB1 "DS1092-12-N8S" DS1092-12-N8S 141.05,47.2 r180 top
L1 "BLM21PG221SN1D" IND_0805 91.275,43.6 r180 top
L2 "BLM21PG221SN1D" IND_0805 91.275,39.7 r180 top
L3 "BLM21PG221SN1D" IND_0805 91.275,47.5 r180 top
L4 "BLM21PG221SN1D" IND_0805 173.4,40.5 r270 bottom
L5 "BLM21PG221SN1D" IND_0805 172.2,36.2 r0 bottom
L6 "BLM21PG221SN1D" IND_0805 166.5,44.6 r0 bottom
L7 "BLM21PG221SN1D" IND_0805 12.717,24.325 r180 bottom
L8 "BLM21PG221SN1D" IND_0805 10.518,29.015 r270 bottom
R1 "0" RES_0805 91.275,45.55 r180 top
R2 "0" RES_0805 91.275,41.65 r180 top
R3 "0" RES_0805 91.275,49.45 r180 top
R4 "10к" RES_0603 107.825,33.525 r270 bottom
R5 "10к" RES_0603 118.6,34.8 r180 bottom
R6 "200" RES_0603 108.025,45.775 r90 top
R7 "200" RES_0603 109.935,45.775 r90 top
R8 "200" RES_0603 111.85,45.775 r90 top
R9A1 "2М" 3224W 81.95,53.375 r180 top (schematic designator R9)
R9A2 "2М" 3224W 69.225,53.375 r180 top (schematic designator R9)
R9A3 "2М" 3224W 56.525,53.375 r180 top (schematic designator R9)
R10A1 "0" RES_0603 41,43.25 r90 top (schematic designator R10)
R10A2 "0" RES_0603 42.5,43.25 r90 top (schematic designator R10)
R10A3 "0" RES_0603 44,43.25 r90 top (schematic designator R10)
R11A1 "NA" RES_0603 41,46.45 r90 top (schematic designator R11)
R11A2 "NA" RES_0603 42.5,46.45 r90 top (schematic designator R11)
R11A3 "NA" RES_0603 44,46.45 r90 top (schematic designator R11)
R12A1 "5,1к" RES_0603 76.275,41.15 r270 top (schematic designator R12)
R12A2 "5,1к" RES_0603 63.55,41.15 r270 top (schematic designator R12)
R12A3 "5,1к" RES_0603 50.825,41.15 r270 top (schematic designator R12)
R13A1 "10к" RES_0603 74.775,39.55 r90 top (schematic designator R13)
R13A2 "10к" RES_0603 62.05,39.55 r90 top (schematic designator R13)
R13A3 "10к" RES_0603 49.325,39.55 r90 top (schematic designator R13)
R14A1 "10к" RES_0603 76.275,38.2 r270 top (schematic designator R14)
R14A2 "10к" RES_0603 63.55,38.2 r270 top (schematic designator R14)
R14A3 "10к" RES_0603 50.825,38.2 r270 top (schematic designator R14)
R15A1 "10к" RES_0603 77.775,39.55 r90 top (schematic designator R15)
R15A2 "10к" RES_0603 65.05,39.55 r90 top (schematic designator R15)
R15A3 "10к" RES_0603 52.325,39.55 r90 top (schematic designator R15)
R16A1 "10к" 3224W 82.1,31.95 r0 top (schematic designator R16)
R16A2 "10к" 3224W 69.25,31.95 r0 top (schematic designator R16)
R16A3 "10к" 3224W 56.525,31.95 r0 top (schematic designator R16)
R17A4 "10к" RES_0603 39.078,44.997 r90 top (schematic designator R17)
R17A5 "10к" RES_0603 36.175,45 r90 top (schematic designator R17)
R18A4 "10к" RES_0603 39.153,47.972 r180 top (schematic designator R18)
R18A5 "10к" RES_0603 36.25,47.975 r180 top (schematic designator R18)
R19 "10к" RES_0603 150.7,11.8 r180 top
R20 "9,1к" RES_0603 146.725,4.35 r90 top
R21 "120" RES_0603 144.975,3.5 r270 top
R22 "10к" RES_0603 134.656,7.875 r0 top
R23 "9,1к" RES_0603 151.15,5.868 r180 top
R24 "10к" RES_0603 132.931,6.525 r270 top
R25 "3,6к" RES_0603 148.175,4.35 r90 top
R26 "10к" RES_0603 139.981,7.875 r180 top
R27 "3,6к" RES_0603 149.55,4.425 r0 top
R28A7 "10к" RES_0603 78.9,6.05 r0 top (schematic designator R28)
R28A8 "10к" RES_0603 48.8,6.05 r0 top (schematic designator R28)
R29A7 "10к" RES_0603 84.6,6.05 r0 top (schematic designator R29)
R29A8 "10к" RES_0603 54.475,6.05 r0 top (schematic designator R29)
R30A7 "15к" RES_0603 72.975,8.5 r270 top (schematic designator R30)
R30A8 "15к" RES_0603 43.225,8.5 r270 top (schematic designator R30)
R31A7 "10к" RES_0603 80.5,7.5 r180 top (schematic designator R31)
R31A8 "10к" RES_0603 50.4,7.5 r180 top (schematic designator R31)
R32A7 "10к" RES_0603 86.2,7.5 r180 top (schematic designator R32)
R32A8 "10к" RES_0603 56.075,7.5 r180 top (schematic designator R32)
R33A7 "10к" RES_0603 71.525,8.5 r270 top (schematic designator R33)
R33A8 "10к" RES_0603 41.775,8.5 r270 top (schematic designator R33)
R34A7 "10к" RES_0603 78.825,23.55 r0 top (schematic designator R34)
R34A8 "10к" RES_0603 49.125,23.55 r0 top (schematic designator R34)
R35A7 "10к" RES_0603 71.241,25.625 r90 top (schematic designator R35)
R35A8 "10к" RES_0603 41.55,25.625 r90 top (schematic designator R35)
R36A7 "16,5к" RES_0603 78.9,25.625 r90 top (schematic designator R36)
R36A8 "16,5к" RES_0603 49.2,25.625 r90 top (schematic designator R36)
R37A7 "10к" RES_0603 82.8,12.575 r0 bottom (schematic designator R37)
R37A8 "10к" RES_0603 52.625,12.575 r0 bottom (schematic designator R37)
R38A7 "16,5к" RES_0603 74.141,25.625 r90 top (schematic designator R38)
R38A8 "16,5к" RES_0603 44.45,25.625 r90 top (schematic designator R38)
R39A7 "10к" RES_0603 75.725,20.975 r0 top (schematic designator R39)
R39A8 "10к" RES_0603 46.05,20.975 r0 top (schematic designator R39)
R40 "10к" RES_0603 125.025,20.35 r180 top
R41 "12к" RES_0603 125.025,15.55 r180 top
R42 "10к" RES_0603 122.125,15.55 r180 top
R43 "200" RES_0603 125.85,10.782 r270 top
R44 "10к" RES_0603 120.471,10.782 r270 top
R45 "10к" RES_0603 125.85,5.732 r90 top
R46 "10" RES_1210 117.671,6.757 r0 top
R47 "200" RES_0603 153.475,38.9 r270 top
R48 "200" RES_0603 150.2,38.9 r270 top
R49 "200" RES_0603 146.9,38.9 r270 top
R50 "1к" RES_0603 107.7,5.475 r90 top
R51 "10к" RES_0603 107.7,9.025 r90 top
R52 "49,9" RES_0603 181.3,30.778 r180 top
R53 "49,9" RES_0603 181.3,35.278 r180 top
R54 "49,9" RES_0603 181.3,39.025 r180 top
R55 "49,9" RES_0603 181.3,43.525 r180 top
R56 "3,3" RES_0603 179.7,32.277 r0 top
R57 "3,3" RES_0603 179.7,40.525 r0 top
R58 "1к" RES_0603 181.3,48.712 r180 top
R59 "3,3" RES_0603 179.7,33.778 r0 top
R60 "3,3" RES_0603 179.7,42.025 r0 top
R61 "1к" RES_0603 181.3,47.212 r180 top
R62 "300" RES_0603 175.95,48.712 r0 top
R63 "1М" RES_0603 172.6,44.9 r180 top
R64 "12к" RES_0603 177.55,47.212 r180 top
R65 "0" RES_0603 169.3,47.175 r90 top
R66 "10к" RES_0603 172,30.75 r0 top
R67 "10к" RES_0603 18.45,52.6 r180 top
R68 "10к" RES_0603 10.6,19.3 r180 top
R69 "10к" RES_0603 11.416,28.625 r0 top
R70 "10к" RES_0603 18.45,49.7 r180 top
R71 "10к" RES_0603 10.6,16.4 r180 top
R72 "40,2к" RES_0603 13.016,30.075 r180 top
R73 "10к" RES_0603 18.45,46.8 r180 top
R74 "10к" RES_0603 10.6,13.5 r180 top
R75 "10к" RES_0603 18.45,43.9 r180 top
R76 "10к" RES_0603 14.391,30.15 r270 top
R77 "10к" RES_0603 10.6,10.6 r180 top
R78 "10к" RES_0603 9,14.95 r0 top
R79 "10к" RES_0603 9,9.15 r0 top
R80 "390" RES_0603 16.85,54.05 r0 top
R81 "390" RES_0603 16.85,51.15 r0 top
R82 "390" RES_0603 16.85,48.25 r0 top
R83 "390" RES_0603 16.85,45.35 r0 top
R84 "10к" RES_0603 9,17.85 r0 top
R85 "10к" RES_0603 9,12.05 r0 top
R86 "10к" RES_0603 30.525,54 r180 top
R87 "10к" RES_0603 30.525,51.5 r180 top
R88 "10к" RES_0603 34.25,27.207 r270 top
R89 "10к" RES_0603 30.525,48.94 r180 top
R90 "10к" RES_0603 36.025,34.782 r0 top
R91 "10к" RES_0603 30.525,46.4 r180 top
R92 "16,5к" RES_0603 36.025,27.132 r0 top
R93 "16,5к" RES_0603 36.025,31.882 r0 top
R94 "10к" RES_0603 40.85,34.782 r0 top
R95 "200" RES_0603 28.5,19.2 r0 bottom
R96 "200" RES_0603 28.5,16.7 r0 bottom
R97 "200" RES_0603 28.5,14.1 r0 bottom
R98 "200" RES_0603 28.5,11.6 r0 bottom
R99 "10к" RES_0603 16.2,23.425 r270 top
R100 "0" RES_0603 14.834,44.475 r0 bottom
R101 "0" RES_0603 14.834,45.925 r0 bottom
R102 "0" RES_0603 14.834,47.375 r0 bottom
R103 "0" RES_0603 14.834,48.825 r0 bottom
R104 "NA" RES_0603 13.384,44.475 r180 bottom
R105 "NA" RES_0603 13.384,45.925 r180 bottom
R106 "NA" RES_0603 13.384,47.375 r180 bottom
R107 "NA" RES_0603 13.384,48.825 r180 bottom
R108 "0" RES_0805 12.717,22.4 r180 bottom
R109 "10к" RES_0603 17.433,25.345 r180 top
R110 "0" RES_0805 12.438,29.015 r270 bottom
R111 "10к" RES_0603 17.3,17.94 r0 bottom
R112 "10к" RES_0603 17.3,15.4 r0 bottom
R113 "6,04к" RES_0603 14.53,25.35 r180 top
R114 "10к" RES_0603 17.3,12.86 r0 bottom
R115 "10к" RES_0603 17.3,10.32 r0 bottom
R116 "10к" RES_0603 165.3,6.3 r180 top
U1A7 "ACPL-C87A-500E" SSO-8 68.7,10.925 r90 top locked (schematic designator U1)
U1A8 "ACPL-C87A-500E" SSO-8 38.985,10.925 r90 top (schematic designator U1)
U2 "TLP291(GB-TP,SE" 11-3C1 153.5,40.875 r90 top
U3 "TLP291(GB-TP,SE" 11-3C1 150.2,40.875 r90 top
U4 "TLP291(GB-TP,SE" 11-3C1 146.9,40.875 r90 top
U5 "ACPL-C87A-500E" SSO-8 18.3,31.425 r0 top
U6 "TLP291-4" SOP-16 20.68,54.02 r0 top
U7 "TLP291-4" SOP-16 26.82,19.21 r180 bottom
VD1 "KP-2012MGC" LED_0805 108.025,49.1 r90 top
VD2 "KP-2012SYC" LED_0805 109.935,49.1 r90 top
VD3 "KP-2012EC" LED_0805 111.85,49.1 r90 top
VD4 "BZX384-C5V1" SOD-323 13.725,10.32 r180 bottom
VD5 "BZX384-C5V1" SOD-323 13.725,12.86 r180 bottom
VD6 "BZX384-C5V1" SOD-323 13.725,15.4 r180 bottom
VD7 "BZX384-C5V1" SOD-323 13.725,17.94 r180 bottom
VT1 "AO3400A" SOT-23-3 124.346,7.382 r270 top
XP1 "B14B-PHDSS" B14B-PHDSS 48.05,51.4 r0 top
XP2 "B2P-VH" B2P-VH 193.44,15.425 r0 top
XP3 "PLD-6" PLD-6 115.865,21.94 r180 top
XP4 "B8B-PHDSS" B8B-PHDSS 135.95,3.625 r180 top
XP5A7 "B8B-PHDSS" B8B-PHDSS 75.175,3.625 r180 top (schematic designator XP5)
XP5A8 "B8B-PHDSS" B8B-PHDSS 45.45,3.625 r180 top (schematic designator XP5)
XP6 "B2B-EH-A" B2B-EH-A 120.896,2.3 r0 top
XP7 "B8B-PHDSS" B8B-PHDSS 153.875,51.375 r0 top
XP8 "B2B-EH-A" B2B-EH-A 107.7,2.3 r0 top
XP9 "B24B-PHDSS" B24B-PHDSS 3.6,38.5 r90 top locked
XP10 "B3B-EH-A" B3B-EH-A 165.725,2.35 r0 top
XS1 "LPJD0012BENL" LPJD0012BENL 186.74,32.407 r90 top
ZQ1 "32,768кГц" NX3215SA 121.45,47.425 r90 top
ZQ2 "16МГц" NX2520SA 116.5,49.275 r180 top
ZQ3 "25МГц" 7M 172.7,46.7 r90 top

## Footprints (in the part's own frame and the unit in brackets; to place one, negate y for a bottom-side part, rotate by r counter-clockwise, add the part's x,y. Pads: shape width x height; smd on the part's side, far side on the other; paste and mask are expansions set on the pad)
7M [mm]
  rect 1.4x1.2 smd: 1(0,0) 2(2.2,0.025) 3(2.2,1.725) 4(0,1.725)
  silkscreen extent -0.92,-0.82 3.13,2.55, body extent -0.55,-0.45 2.75,2.15, height 0.8
11-3C1 [mm]
  rect 1.5x0.8 smd: 1(0,0) 2(0,-1.275) 3(6.4,-1.275) 4(6.4,-0.025)
  silkscreen extent -0.12,-1.95 5.25,1, body extent -0.28,-1.95 6.73,0.65, height 2.2
3224W [mm]
  rect 2.2x1.3 smd: 1(0,0) 3(0,2.525)
  rect 2.2x2 smd: 2(-3.45,1.3)
  silkscreen extent -3.72,-1.12 0.25,3.72, body extent -3.72,-1.12 0.23,3.71, height 5.29
B2B-EH-A [mm]
  rect 1.8x1.8 hole 0.965: 1(0,0)
  round 1.8 hole 1: 2(2.5,0)
  silkscreen extent -3.5,-2.2 5.05,1.6, body extent -2.45,-2.2 5.05,1.6, height 6
B2P-VH [mm]
  rect 2.8x2.8 hole 1.8: 1(0,0)
  round 2.8 hole 1.8: 2(3.96,0)
  silkscreen extent -1.92,-4.75 5.92,6.5, body extent -1.93,-4.75 5.93,3.75, height 10.9
B3B-EH-A [mm]
  rect 1.8x1.8 hole 0.965: 1(0,0)
  round 1.8 hole 1: 2(2.5,0) 3(5,0)
  silkscreen extent -2.5,-2.25 7.5,2.5, body extent -2.5,-2.25 7.5,1.55, height 6
B8B-PHDSS [mm]
  rect 1.2x1.2 hole 0.8: 1(0,0)
  round 1.2 hole 0.8: 2(0,2) 3(-2,0) 4(-2,2) 5(-4,0) 6(-4,2) 7(-6,0) 8(-6,2)
  silkscreen extent -7.93,-2.47 1.97,3.52, body extent -7.93,-1.48 1.97,3.52, height 6.5
B14B-PHDSS [mm]
  rect 1.2x1.2 hole 0.8: 1(0,0)
  round 1.2 hole 0.8: 2(0,2) 3(-2,0) 4(-2,2) 5(-4,0) 6(-4,2) 7(-6,0) 8(-6,2) 9(-8,0) 10(-8,2) 11(-10,0) 12(-10,2) 13(-12,0) 14(-12,2)
  silkscreen extent -13.95,-2.47 1.95,3.5, body extent -13.95,-1.5 1.95,3.5, height 6.5
B24B-PHDSS [mm]
  rect 1.2x1.2 hole 0.8: 1(0,0)
  round 1.2 hole 0.8: 2(0,2) 3(-2,0) 4(-2,2) 5(-4,0) 6(-4,2) 7(-6,0) 8(-6,2) 9(-8,0) 10(-8,2) 11(-10,0) 12(-10,2) 13(-12,0) 14(-12,2) 15(-14,0) 16(-14,2) 17(-16,0) 18(-16,2) 19(-18,0) 20(-18,2) 21(-20,0) 22(-20,2) 23(-22,0) 24(-22,2)
  silkscreen extent -23.95,-2.47 1.95,3.5, body extent -23.95,-1.5 1.95,3.5, height 6.5
CAP_0603 [mm]
  rect 0.85x0.95 smd: 1(0.025,0) 2(1.575,0)
  silkscreen extent -0.58,-0.65 2.17,0.65, body extent 0.02,-0.43 1.63,0.44, height 0.8
CAP_0805 [mm]
  rect 1.27x1.27 smd: 1(0,0) 2(2,0)
  silkscreen extent -0.85,-0.85 2.85,0.85, body extent 0,-0.62 2,0.63, height 1
CAP_1206 [mm]
  rect 1.6x1.8 smd: 1(0,0) 2(2.8,0)
  silkscreen extent -1.02,-1.12 3.83,1.12, body extent -0.25,-0.77 2.95,0.83, height 0.94
CAP_A [mm]
  rect 2x1.2 smd: 1(0,0) 2(2.8,0)
  silkscreen extent -2.15,-0.82 4.03,0.82, body extent -0.33,-0.8 3.13,0.8, height 1.65
CAP_B [mm]
  rect 2x2.2 smd: 1(0,0) 2(3,0)
  silkscreen extent -2.15,-1.4 4.25,1.4, body extent -0.25,-1.4 3.25,1.4, height 1.9
CAP_C [mm]
  rect 2.6x2.2 smd: 1(0,0) 2(5,0)
  silkscreen extent -2.4,-1.58 6.53,1.6, body extent -0.5,-1.6 5.5,1.6, height 2.5
DS1092-12-N8S [mm]
  rect 3.9x2.4 smd: 1(0,0) 2(16,0)
  round 1.2 hole 1.2: 1(4,0)
  round 1.5 hole 1.5: 1(11.5,0)
  silkscreen extent 0,-7.37 17.4,7.37, body extent -1.4,-7.37 17.4,7.37, height 4.23
IND_0805 [mm]
  rect 1.27x1.27 smd: 1(0,0) 2(2,0)
  silkscreen extent -0.85,-0.85 2.85,0.85, body extent 0,-0.62 2,0.62, height 0.85
LED_0805 [mm]
  rect 1.27x1.27 smd: 1(0,0) 2(2,0)
  silkscreen extent -0.85,-0.85 3.22,0.85, body extent -0.03,-0.46 2.03,0.45, height 0.85
LPJD0012BENL [mm]
  rect 1.4x1.4 hole 0.9: 1(0,0)
  round 1.4 hole 0.9: 2(1.27,2.54) 3(2.54,0) 4(3.81,2.54) 5(5.08,0) 6(6.35,2.54) 7(7.62,0) 8(8.89,2.54)
  round 1.6 hole 1.02: 9(-1.907,-10.46) 10(0.633,-10.46) 11(8.223,-10.46) 12(10.763,-10.46)
  round 2.1 hole 1.6: 13(-3.475,-2.46) 14(12.365,-2.46)
  round 0 hole 3.25 unplated: ""(-1.27,-6.35) ""(10.16,-6.35)
  silkscreen extent -3.57,-13.08 12.42,3.62, body extent -3.57,-13.08 12.42,3.63, height 17.4
LQFP-48 [mm]
  rect 1.8x0.3 smd: 1(0,0) 2(0,-0.5) 3(0,-1) 4(0,-1.5) 5(0,-2) 6(0,-2.5) 7(0,-3) 8(0,-3.5) 9(0,-4) 10(0,-4.5) 11(0,-5) 12(0,-5.5) 25(8.1,-5.5) 26(8.1,-5) 27(8.1,-4.5) 28(8.1,-4) 29(8.1,-3.5) 30(8.1,-3) 31(8.1,-2.5) 32(8.1,-2) 33(8.1,-1.5) 34(8.1,-1) 35(8.1,-0.5) 36(8.1,0)
  rect 0.3x1.8 smd: 13(1.3,-6.8) 14(1.8,-6.8) 15(2.3,-6.8) 16(2.8,-6.8) 17(3.3,-6.8) 18(3.8,-6.8) 19(4.3,-6.8) 20(4.8,-6.8) 21(5.3,-6.8) 22(5.8,-6.8) 23(6.3,-6.8) 24(6.8,-6.8) 37(6.8,1.3) 38(6.3,1.3) 39(5.8,1.3) 40(5.3,1.3) 41(4.8,1.3) 42(4.3,1.3) 43(3.8,1.3) 44(3.3,1.3) 45(2.8,1.3) 46(2.3,1.3) 47(1.8,1.3) 48(1.3,1.3)
  silkscreen extent -0.13,-5.6 6.9,0.92, body extent -0.45,-7.25 8.55,1.75, height 1.6
LQFP-100 [mm]
  rect 1.55x0.3 smd: 1(0,-0.025) 2(0,-0.525) 3(0,-1.025) 4(0,-1.525) 5(0,-2.025) 6(0,-2.525) 7(0,-3.025) 8(0,-3.525) 9(0,-4.025) 10(0,-4.525) 11(0,-5.025) 12(0,-5.525) 13(0,-6.025) 14(0,-6.525) 15(0,-7.025) 16(0,-7.525) 17(0,-8.025) 18(0,-8.525) 19(0,-9.025) 20(0,-9.525) 21(0,-10.025) 22(0,-10.525) 23(0,-11.025) 24(0,-11.525) 25(0,-12.025) 51(15.05,-12.025) 52(15.05,-11.525) 53(15.05,-11.025) 54(15.05,-10.525) 55(15.05,-10.025) 56(15.05,-9.525) 57(15.05,-9.025) 58(15.05,-8.525) 59(15.05,-8.025) 60(15.05,-7.525) 61(15.05,-7.025) 62(15.05,-6.525) 63(15.05,-6.025) 64(15.05,-5.525) 65(15.05,-5.025) 66(15.05,-4.525) 67(15.05,-4.025) 68(15.05,-3.525) 69(15.05,-3.025) 70(15.05,-2.525) 71(15.05,-2.025) 72(15.05,-1.525) 73(15.05,-1.025) 74(15.05,-0.525) 75(15.05,-0.025)
  rect 0.3x1.55 smd: 26(1.525,-13.55) 27(2.025,-13.55) 28(2.525,-13.55) 29(3.025,-13.55) 30(3.525,-13.55) 31(4.025,-13.55) 32(4.525,-13.55) 33(5.025,-13.55) 34(5.525,-13.55) 35(6.025,-13.55) 36(6.525,-13.55) 37(7.025,-13.55) 38(7.525,-13.55) 39(8.025,-13.55) 40(8.525,-13.55) 41(9.025,-13.55) 42(9.525,-13.55) 43(10.025,-13.55) 44(10.525,-13.55) 45(11.025,-13.55) 46(11.525,-13.55) 47(12.025,-13.55) 48(12.525,-13.55) 49(13.025,-13.55) 50(13.525,-13.55) 76(13.525,1.5) 77(13.025,1.5) 78(12.525,1.5) 79(12.025,1.5) 80(11.525,1.5) 81(11.025,1.5) 82(10.525,1.5) 83(10.025,1.5) 84(9.525,1.5) 85(9.025,1.5) 86(8.525,1.5) 87(8.025,1.5) 88(7.525,1.5) 89(7.025,1.5) 90(6.525,1.5) 91(6.025,1.5) 92(5.525,1.5) 93(5.025,1.5) 94(4.525,1.5) 95(4.025,1.5) 96(3.525,1.5) 97(3.025,1.5) 98(2.525,1.5) 99(2.025,1.5) 100(1.525,1.5)
  silkscreen extent -0.12,-12.37 13.87,0.78, body extent -0.48,-14.03 15.53,1.98, height 1.5
MSOP-10 [mm]
  rect 1.4x0.4 smd: 1(-0.025,0) 2(-0.025,-0.5) 3(-0.025,-1) 4(-0.025,-1.5) 5(-0.025,-2) 6(4.575,-2) 7(4.575,-1.5) 8(4.575,-1) 9(4.575,-0.5) 10(4.575,0)
  silkscreen extent -0.1,-2.5 3.62,0.67, body extent -0.21,-2.5 4.81,0.5, height 1.05
NX2520SA [mm]
  rect 1.2x1 smd: 1(0,0) 2(1.7,0) 3(1.7,1.3) 4(0,1.3)
  silkscreen extent -0.8,-0.7 2.5,2, body extent -0.4,-0.35 2.1,1.65, height 0.65
NX3215SA [mm]
  rect 1x1.8 smd: 1(0,0) 2(2.5,0)
  silkscreen extent -0.7,-1.1 3.2,1.1, body extent -0.35,-0.75 2.85,0.75, height 0.8
PLD-6 [mm]
  rect 1.6x1.6 hole 1: 1(0,0)
  round 1.6 hole 1: 2(0,2.54) 3(2.54,0) 4(2.54,2.54) 5(5.08,0) 6(5.08,2.54)
  silkscreen extent -1.27,-2.12 6.27,3.81, body extent -1.3,-1.2 6.32,3.8, height 8.5
RES_0603 [mm]
  rect 0.85x0.95 smd: 1(0.025,0) 2(1.575,0)
  silkscreen extent -0.58,-0.65 2.17,0.65, body extent -0.05,-0.48 1.65,0.48, height 0.6
RES_0805 [mm]
  rect 1.27x1.27 smd: 1(0,0) 2(2,0)
  silkscreen extent -0.85,-0.85 2.85,0.85, body extent 0,-0.62 2,0.62, height 0.6
RES_1210 [mm]
  rect 1.6x2.8 smd: 1(-0.025,0.025) 2(2.775,0.025)
  silkscreen extent -1.02,-1.58 3.77,1.63, body extent -0.15,-1.28 2.95,1.33, height 0.57
SOD-323 [mm]
  rect 0.9x0.4 smd: 1(-0.025,0) 2(2.475,0)
  silkscreen extent -1.02,-0.7 3.1,0.72, body extent -0.05,-0.68 2.55,0.67, height 1.1
SOIC-8 [mm]
  rect 1.8x0.6 smd: 1(0,0) 2(0,-1.25) 3(0,-2.55) 4(0,-3.8) 5(6,-3.8) 6(6,-2.55) 7(6,-1.25) 8(6,0)
  silkscreen extent -0.12,-4.38 4.8,0.87, body extent -0.13,-4.37 6.08,0.63, height 1.75
"SOIC-8 EPAD" [mm]
  rect 1.8x0.6 smd: 1(0,0) 2(0,-1.25) 3(0,-2.55) 4(0,-3.8) 5(6,-3.8) 6(6,-2.55) 7(6,-1.25) 8(6,0)
  rect 2.5x3 smd: EPAD(3,-1.9)
  silkscreen extent -0.12,-4.38 4.8,0.88, body extent -0.13,-4.37 6.08,0.63, height 1.75
SOIC-16W [mm]
  rect 2.3x0.6 smd: 1(0,0) 2(0,-1.27) 3(0,-2.54) 4(0,-3.81) 5(0,-5.08) 6(0,-6.35) 7(0,-7.62) 8(0,-8.89) 9(9.6,-8.89) 10(9.6,-7.62) 11(9.6,-6.35) 12(9.6,-5.08) 13(9.6,-3.81) 14(9.6,-2.54) 15(9.6,-1.27) 16(9.6,0)
  silkscreen extent -0.15,-9.9 8.03,1, body extent -0.51,-9.7 10.11,0.8, height 2.62
SOP-16 [mm]
  rect 1.14x0.91 smd: 1(0,0) 2(0,-1.27) 3(0,-2.54) 4(0,-3.81) 5(0,-5.08) 6(0,-6.35) 7(0,-7.62) 8(0,-8.89) 9(6.22,-8.89) 10(6.22,-7.62) 11(6.22,-6.35) 12(6.22,-5.08) 13(6.22,-3.81) 14(6.22,-2.54) 15(6.22,-1.27) 16(6.22,0)
  silkscreen extent -1.1,-9.43 5.3,0.55, body extent -0.07,-9.44 6.17,0.54, height 1.58
SOT-23-3 [mm]
  rect 1.2x0.55 smd: 1(0,0) 2(0,-1.9) 3(2.15,-0.95)
  silkscreen extent -0.27,-2.5 2,0.65, body extent -0.15,-2.45 2.35,0.55, height 1
SOT-23-5 [mm]
  rect 1.2x0.55 smd: 1(0,0) 2(0,-0.95) 3(0,-1.9) 4(2.15,-1.9) 5(2.15,0)
  silkscreen extent -0.27,-2.5 1.97,0.65, body extent -0.15,-2.45 2.35,0.55, height 1.1
SOT-23-6 [mm]
  rect 1.2x0.55 smd: 1(0,0) 2(0,-0.95) 3(0,-1.9) 4(2.15,-1.9) 5(2.15,-0.95) 6(2.15,0)
  silkscreen extent -0.27,-2.5 1.97,0.65, body extent -0.3,-2.4 2.5,0.5, height 1.18
SOT-89 [mm]
  rect 0.57x1.4 smd: 1(0,0) 3(3,0)
  rect 0.65x1.4 smd: 2(1.5,0)
  Top Layer region: 1.825,0.7 2.5,1.375 2.5,3.825 0.5,3.825 0.5,1.375 1.175,0.7 1.175,-0.7 1.825,-0.7
  Top Layer lines w0.5: 1.5,0 1.5,-0.075
  silkscreen extent -0.82,-0.07 3.75,3, body extent -0.75,-0.42 3.75,3.58, height 1.5
SSO-8 [mm]
  rect 1.905x0.64 smd: 1(0,0) 2(0,-1.275) 3(0,-2.55) 4(0,-3.825) 5(10.75,-3.825) 6(10.75,-2.55) 7(10.75,-1.275) 8(10.75,0)
  silkscreen extent -0.12,-4.82 9,1.02, body extent -0.33,-4.82 11.18,1.03, height 3.61
"TME (SIP-4)" [mm]
  rect 1.4x1.4 hole 0.8: 1(0,0)
  round 1.4 hole 0.8: 2(2.54,0) 3(5.08,0) 4(7.62,0)
  silkscreen extent -1.9,-1.7 9.6,5.4, body extent -1.9,-1.7 9.6,5.4, height 10.2
"TMR3 (SIP-8)" [mm]
  rect 1.3x1.3 hole 0.7: 1(0,0)
  round 1.3 hole 0.7: 2(2.54,0) 3(5.08,0) 5(10.16,0) 6(12.7,0) 7(15.24,0) 8(17.78,0)
  silkscreen extent -2,-5.58 19.8,3.5, body extent -2,-5.6 19.8,3.5, height 11.2
"TMR4 (SIP-8)" [mm]
  rect 1.3x1.3 hole 0.7: 1(0,0)
  round 1.3 hole 0.7: 2(2.54,0) 3(5.08,0) 5(10.16,0) 6(12.7,0) 7(15.24,0) 8(17.78,0)
  silkscreen extent -2,-6.7 19.9,2.5, body extent -2,-6.75 19.8,2.55, height 11.4
"TMU3 (SIP-4)" [mm]
  rect 1.6x1.6 hole 1: 1(0,0)
  round 1.6 hole 1: 2(2.54,0) 3(5.08,0) 4(7.62,0)
  silkscreen extent -1.9,-2.42 9.6,7.1, body extent -1.9,-2.48 9.6,7.12, height 10.2
TO-252 [mm]
  rect 1.5x2.8 smd: 1(0,0) 3(4.575,0)
  rect 6.3x6.1 smd: 2(2.3,6.2)
  silkscreen extent -2.17,-0.9 5.77,8.93, body extent -0.97,-0.94 5.57,9, height 2.44